# Altium PCB 脉冲延时.PcbDoc
Units mm, origin at the board's own origin, x right, y up, seen from the top; angles counter-clockwise.
Board outline 31.5 x 23 mm, 2 copper layers (Top Layer, Bottom Layer); 15 components, 13 nets, 70 pads, 23 vias.
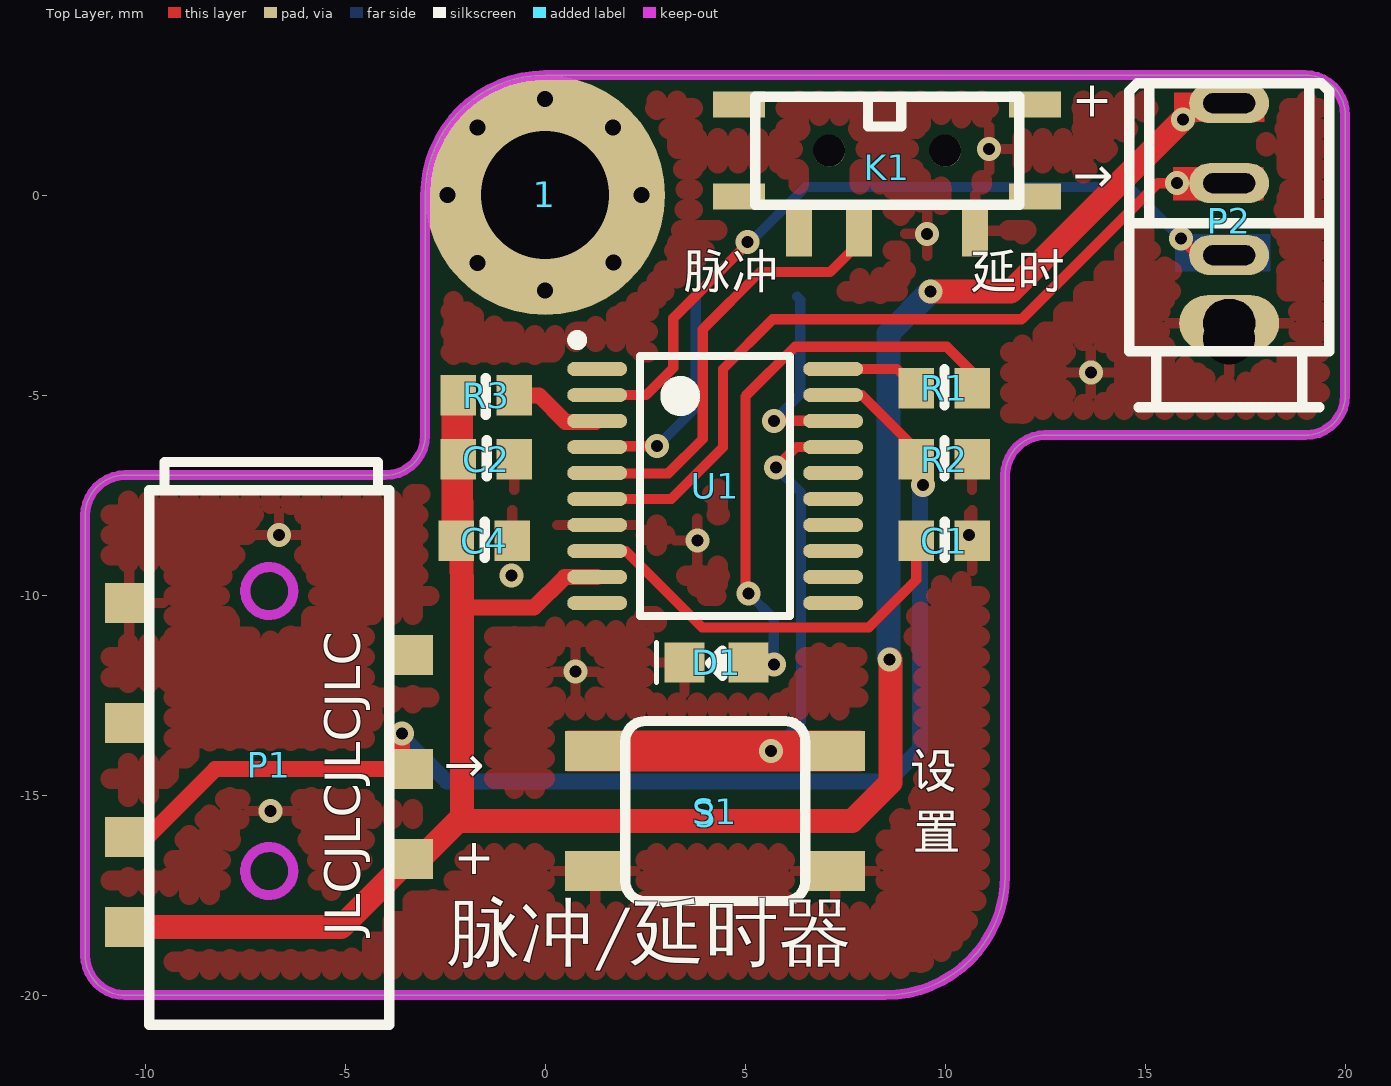
[diagram p0: Top Layer view]
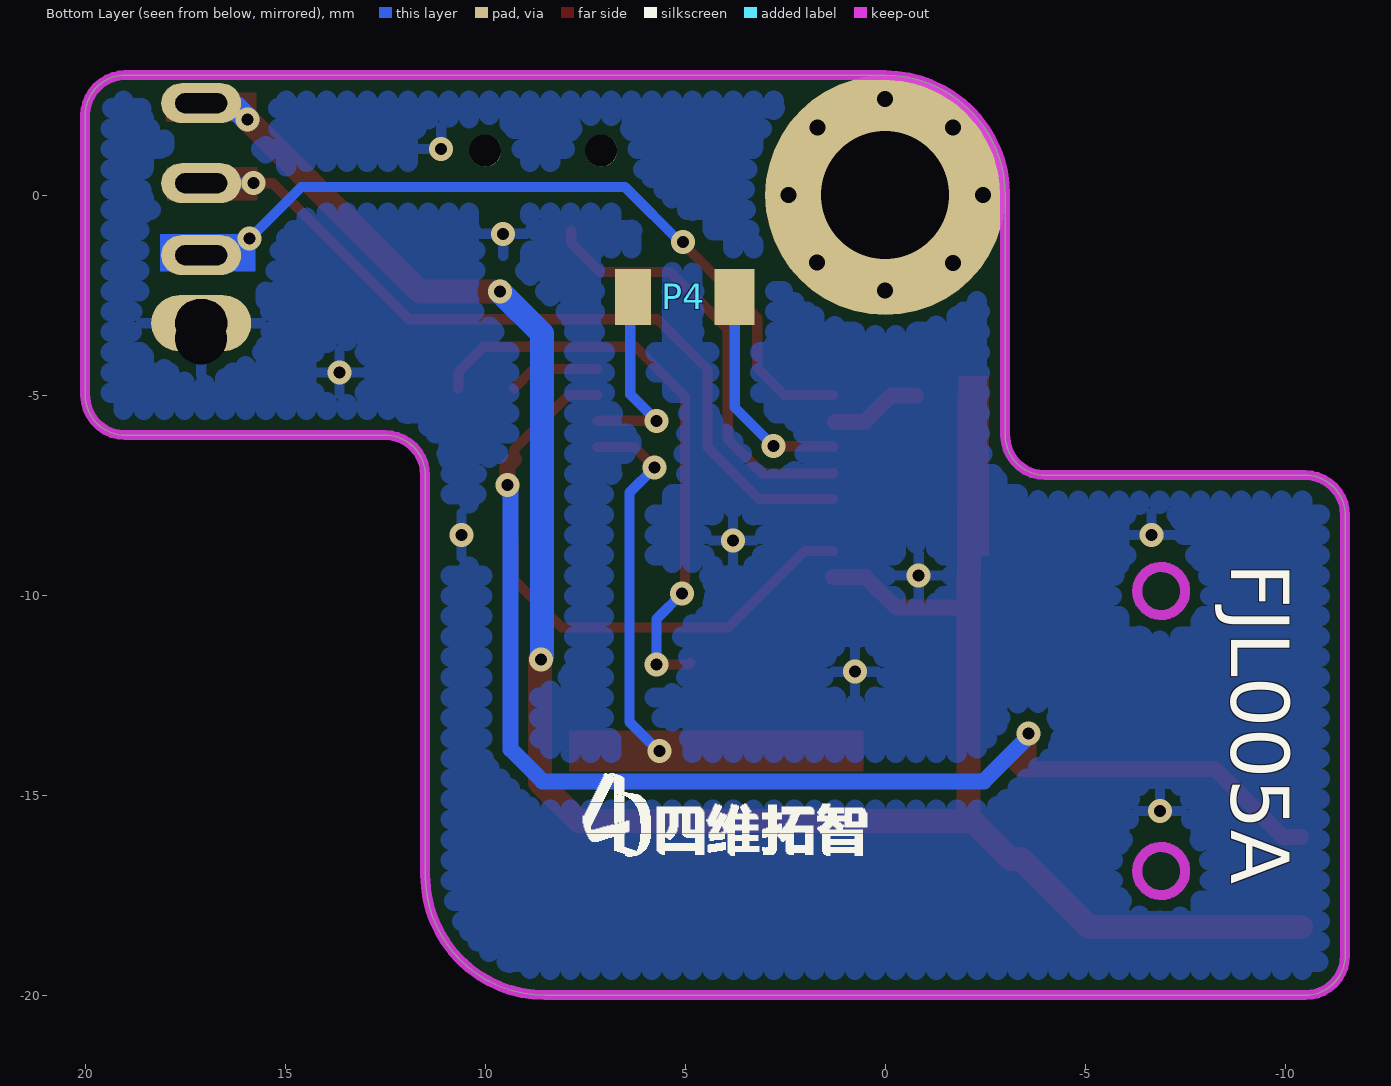
[diagram p1: Bottom Layer view, seen from below]
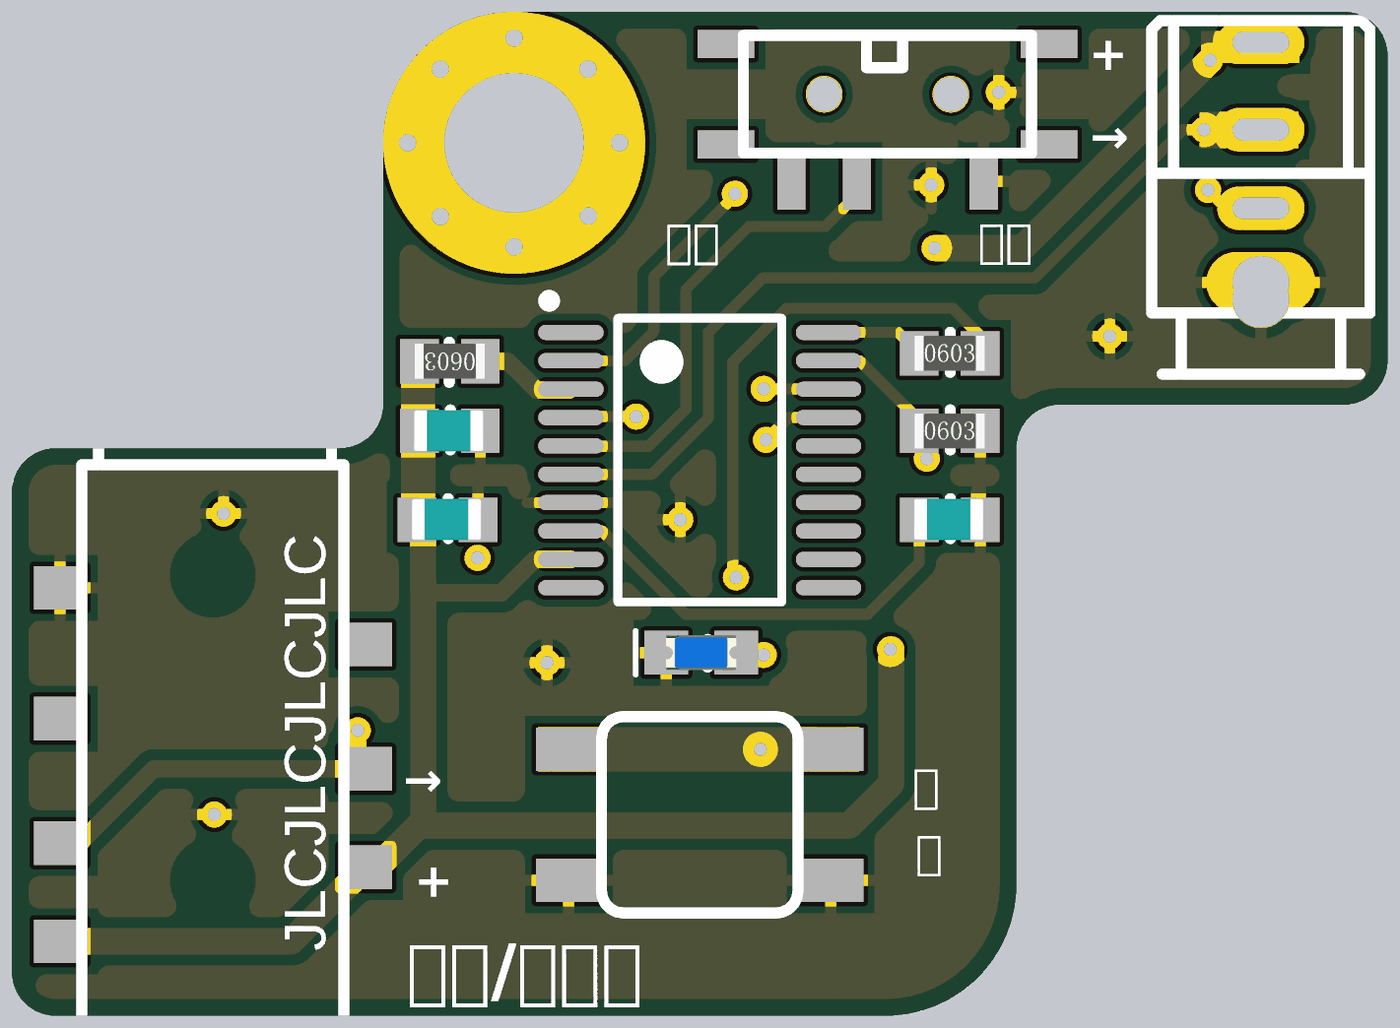
[diagram p2: 3D render of the assembled board from above, using the file's embedded part models]

## Layer stack, top to bottom
Top Layer: signal copper 0.0356
Dielectric: dielectric 0.32, FR-4, Dk 4.8
Bottom Layer: signal copper 0.0356

## Board outline
-11.5,-19 -11.5,-8 cw(c-10.5,-8) -10.5,-7 -4,-7 ccw(c-4,-6) -3,-6 -3,0 cw(c0,0) 0,3 19,3 cw(c19,2) 20,2 20,-5 cw(c19,-5) 19,-6 12.5,-6 ccw(c12.5,-7) 11.5,-7 11.5,-17 cw(c8.5,-17) 8.5,-20 -10.5,-20 cw(c-10.5,-19)

## Design rules (kind name [scope] priority, off if disabled: settings)
Clearance [All] p1: gap=0.254
PolygonConnect [All] p1: connectstyle=Relief reliefconductorwidth=0.254 reliefentries=4 polygonreliefangle="90 Angle"
RoutingVias [All] p1: holewidth=0.711 width=1.27 viastyle="Through Hole" minholewidth=0.711 minwidth=1.27 maxholewidth=0.711 maxwidth=1.27
SilkToSilkClearance [All] p1 off: silktosilkclearance=0.254
SilkscreenOverComponentPads [All] p1 off: minsilkscreentomaskgap=0.254
SolderMaskExpansion [All] p1: expansion=0.102
TestPointUsage [All] p1: valid=0 allowmultiple=FALSE
Testpoint [All] p1: side=15 testpointundercomponent=TRUE minsize=1.016 maxsize=2.54 preferedsize=1.524 minholesize=0 maxholesize=1.016 preferedholesize=0.813 testpointgrid=0.025 style=1023 order=0123456789
Width [All] p1: maxlimit=0.6 minlimit=0.254 preferedwidth=0.254
22 further rules are at their usual default settings.

## Classes and differential pairs
component class 脉冲延时: 1 C1 C2 C4 D1 K1 P1 P2 P4 R1 R2 R3 S1 U1

## Components (designator, comment, footprint, x,y, rotation, side; value= is the part's Value field where it differs from the comment)
1 "M4固定孔" M4固定孔 0,0 r90 top
3 "" "LOGO B1" 4.031,-15.475 r0 top
C1 "1uF" 0603C 9.976,-8.636 r0 top
C2 "100nF" 0603C -1.473,-6.604 r0 top
C4 "10uF" 0603C -1.524,-8.636 r0 top
D1 "LED" 0603D 4.283,-11.684 r180 top
K1 "单刀双掷开关" 侧拨7P2档MSK开关 8.55,1.112 r0 top
P1 "4段3.5插座" 4段3.5耳机贴片座 -6.9,-13.596 r180 top
P2 "4段3.5插头" 4段3.5插头 17.1,0.3 r270 top
P4 "测试点2" 2SMT-2.54 5.032,-2.54 r180 bottom
R1 "1K" 0603R 9.973,-4.826 r0 top
R2 "100K" 0603R 9.973,-6.604 r0 top
R3 "10K" 0603R -1.473,-5.004 r180 top
S1 "按键" 按键4.5*4.5*4.8 4.25,-15.398 r270 top
U1 "STM8S003" TSSOP20 4.25,-7.27 r0 top

## Footprints (in the part's own frame and the unit in brackets; to place one, negate y for a bottom-side part, rotate by r counter-clockwise, add the part's x,y. Pads: shape width x height; smd on the part's side, far side on the other; paste and mask are expansions set on the pad)
2SMT-2.54 [mm]
  rect 0.9x1.4 smd: 1(-1.27,0)
  rect 1x1.4 smd: 2(1.27,0)
4段3.5插头 [mm]
  oval 1.4x2.5 hole 1.2 slot 1.3 at 90 deg: 1(3.5,0)
  round 1 hole 1.3: 1(3.886,0)
  oval 1x2 hole 0.5 slot 1.3 at 90 deg: 2(1.8,0) 3(0,0) 4(-2,0)
  silkscreen extent -2.5,-2.5 5.6,2.5, body extent -3.33,-2.54 20.32,2.46, height 5
4段3.5耳机贴片座 [mm]
  rect 1.2x1 smd: 1(3.5,-3.4) 2(-3.5,-2.1) 2(3.5,-0.4) 3(-3.5,0.75) 3(3.5,2.45) 4(-3.5,3) 4(3.5,4.7)
  Keep-Out Layer circle w0.254: c0,-3.7 r0.6
  Keep-Out Layer circle w0.254: c0,3.3 r0.6
  silkscreen extent -3,-6.93 3,7.14, body extent -3.75,-7.38 3.86,7.12, height 5.49
0603C [mil] "Chip Capacitor, 2-Leads, Body 1.0x0.5mm, IPC Medium Density"
  rect 35x40 smd: 1(-27.5,0) 2(27.5,0)
  silkscreen extent 0,-17 0,19, body extent -32,-18 30,19, height 31
0603D [mm]
  rect 1x1 smd: 1(-0.8,0) 2(0.8,0)
  silkscreen extent -0.15,-0.5 1.5,0.5, body extent -0.81,-0.4 0.81,0.4, height 0.6
0603R [mil]
  rect 35x40 smd: 1(-27.5,0) 2(27.5,0)
  silkscreen extent 0,-17 0,19, body extent -31,-16 32,16, height 18
"LOGO B1" [mm]
M4固定孔 [mm]
  round 0.8 hole 0.4: 0(0,2.438) 1(1.689,1.689) 2(2.4,0) 3(1.689,-1.689) 4(0,-2.413) 5(-1.676,-1.702) 6(-2.388,0) 7(-1.689,1.689)
  round 6 hole 3.2: 0(0,0)
TSSOP20 [mm]
  oval 1.5x0.35 smd: 1(-2.95,2.925) 2(-2.95,2.275) 3(-2.95,1.625) 4(-2.95,0.975) 5(-2.95,0.325) 6(-2.95,-0.325) 7(-2.95,-0.975) 8(-2.95,-1.625) 9(-2.95,-2.275) 10(-2.95,-2.925) 11(2.95,-2.925) 12(2.95,-2.275) 13(2.95,-1.625) 14(2.95,-0.975) 15(2.95,-0.325) 16(2.95,0.325) 17(2.95,0.975) 18(2.95,1.625) 19(2.95,2.275) 20(2.95,2.925)
  silkscreen extent -3.57,-3.25 1.88,3.77, body extent -3.15,-3.25 3.1,3.25, height 2
侧拨7P2档MSK开关 [mm]
  rect 0.65x1.3 smd: 1(2.2,-2) 2(-0.7,-2) 3(-2.2,-2)
  rect 1.3x0.65 smd: 4(-3.7,-1.15) 5(-3.7,1.15) 6(3.7,1.15) 7(3.7,-1.15)
  round 0.8 hole 0.8: 8(-1.45,0) 9(1.45,0)
  silkscreen extent -3.3,-1.35 3.3,1.35, body extent -3.43,-1.48 3.43,1.48, height 2
按键4.5*4.5*4.8 [mm]
  rect 1x1.5 smd: 1(-1.5,3) 1(-1.5,-3) 2(1.5,3) 2(1.5,-3)
  silkscreen extent -2.25,-2.25 2.25,2.25, body extent -2.26,-3.71 2.26,3.68, height 4.8

## Part data
C1 C2 C4: library part Cap, "Capacitor"
D1: library part LED0, "Typical INFRARED GaAs LED"
P4: library part "Header 2", "Header, 2-Pin"
R1 R2 R3: library part Res1, "Resistor"
S1: library part SW-PB, "Switch"

## Via types
v1: diameter 0.6, hole 0.3, Top Layer to Bottom Layer, 23 vias

## Nets (pads, with @x,y where several pads share a name; then routed paths per layer and width w, separated by ;. In a path a pad name is that pad's centre, name@x,y a point inside that pad or via, vN(x,y) a via of type N, cw(c..) or ccw(c..) an arc to the next point about the centre after c; other vN are vias at no path point)
GND: C1.2 C2.2 C4.2 D1.2 K1.1 P1.1 P2.1 R2.2 S1.2 U1.7
  other v1: -6.866,-15.392 0.754,-11.913 -0.838,-9.511 3.802,-8.636 -6.655,-8.495 10.592,-8.495 13.64,-4.431 9.55,-0.965 11.1,1.157
IN: P1.3 R2.1 U1.19 | length 32.8
  Top Layer w0.254: U1.19@7.209,-5.004 U1.19 7.911,-4.995 9.275,-6.358 R2.1
  Top Layer w0.4: P1.3@-10.4,-16.046 -9.95,-16.046 -8.25,-14.346 P1.3@-3.4,-14.346 ; v1(-3.581,-13.462) -3.581,-14.165 P1.3@-3.4,-14.346 ; P1.3@-3.277,-14.223 P1.3@-3.4,-14.346 ; R2.1 9.449,-6.778 v1(9.449,-7.239)
  Bottom Layer w0.4: v1@-3.581,-13.538 -2.468,-14.652 8.564,-14.652 9.365,-13.851 9.365,-7.323 v1(9.449,-7.239)
NetC1_1: C1.1 U1.8 | length 10.2
  Top Layer w0.254: U1.8 2.012,-8.895 3.92,-10.803 8.095,-10.803 9.278,-9.62 C1.1
NetD1_1: D1.1 R1.2 | length 14.7
  Top Layer w0.254: D1.1@4.864,-11.684 4.915,-11.735 v1(5.715,-11.735) ; v1(5.08,-9.957) 5.004,-9.881 5.004,-5.029 6.244,-3.789 10.037,-3.789 10.672,-4.423 R1.2
  Bottom Layer w0.254: v1(5.08,-9.957) 5.715,-10.592 v1(5.715,-11.735)
NetK1_2: K1.2 U1.5 | length 10.9
  Top Layer w0.254: U1.5 1.31,-6.955 3.076,-6.955 3.937,-6.094 3.937,-3.353 5.371,-1.919 7.123,-1.919 7.85,-1.192 K1.2
NetR1_1: R1.1 U1.20 | length 2.3
  Top Layer w0.254: U1.20 8.794,-4.345 R1.1
NetR3_1: R3.1 U1.3 | length 2.3
  Top Layer w0.4: R3.1 -0.156,-5.004 0.506,-5.666 U1.3@1.258,-5.666
NetS1_1: S1.1 U1.17 | length 15.3
  Top Layer w0.254: v1(5.766,-6.807) 6.278,-6.295 U1.17
  Top Layer w0.6: S1.1@1.25,-13.898 v1(5.639,-13.898) S1.1@7.25,-13.898
  Bottom Layer w0.254: v1(5.639,-13.898) 5.66,-13.898 6.396,-13.162 6.396,-7.437 v1(5.766,-6.807)
NRST: P4.2 U1.4 | length 5.6
  Top Layer w0.254: U1.4 1.321,-6.274 v1(2.794,-6.274)
  Bottom Layer w0.254: v1(2.794,-6.274) 3.762,-5.306 P4.2
OUT: P2.3 U1.6 | length 20.2
  Top Layer w0.254: U1.6 3.154,-7.595 4.445,-6.304 4.445,-4.343 5.69,-3.099 11.911,-3.099 15.31,0.3 v1(15.799,0.3)
  Bottom Layer w0.254: v1(15.799,0.3) P2.3
SWIM: P4.1 U1.18 | length 4.9
  Top Layer w0.254: v1(5.715,-5.639) 7.194,-5.639 U1.18
  Bottom Layer w0.254: v1(5.715,-5.639) 6.375,-4.978 6.375,-2.613 P4.1
TX: P2.2 U1.2 | length 20.1
  Top Layer w0.254: U1.2 2.523,-4.995 3.2,-4.318 3.2,-3.073 v1@4.928,-1.346 ; v1(15.889,-1.081) 16.308,-1.5 P2.2
  Bottom Layer w0.254: v1(5.055,-1.168) 5.105,-1.118 v1@5.105,-1.067 ; v1@5.093,-1.206 6.502,0.203 14.605,0.203 v1(15.889,-1.081) ; P2.2@16.308,-1.5 P2.2
VCC: C2.1 C4.1 P1.4 P2.4 R3.2 U1.9 | length 57
  Top Layer w0.4: -2.083,-10.312 -0.282,-10.312 0.485,-9.545 U1.9
  Top Layer w0.6: P1.4@-10.4,-18.296 -5.1,-18.296 -3.4,-16.596 -3.134,-16.596 -2.184,-15.646 -2.083,-15.646 ; R3.2 -2.108,-5.067 -2.108,-6.604 -2.094,-8.635 -2.083,-10.312 -2.083,-15.646 ; v1@8.636,-11.608 8.636,-14.681 7.671,-15.646 -2.083,-15.646 ; v1(9.627,-2.413) 11.633,-2.413 v1(15.939,1.892)
  Bottom Layer w0.6: v1@8.585,-11.532 8.585,-3.454 v1(9.627,-2.413) ; v1(15.939,1.892) 16.231,2.184 16.984,2.184 P2.4
  other v1: 8.611,-11.608
pads on no net: 1.0 1.1 1.2 1.3 1.4 1.5 1.6 1.7 K1.3 K1.4 K1.5 K1.6 K1.7 K1.8 K1.9 P1.2 U1.1 U1.10 U1.11 U1.12 U1.13 U1.14 U1.15 U1.16

## Polygon pours and split planes (outlines as drawn)
GND on Top Layer "Bottom Layer-No Net" (hatched 90Degree grid 0.508 track 0.508, remove dead copper, pour order 1000): -14.656,5.74 22.098,5.74 22.606,6.248 22.784,6.071 22.784,-24.74 -15.977,-24.74 -16.078,-24.638 -14.656,-23.216 -14.656,5.74
GND on Bottom Layer "Bottom Layer-No Net" (hatched 90Degree grid 0.508 track 0.508, remove dead copper, pour order 1001): -12.7,5.029 -12.624,5.105 21.133,5.105 21.133,-22.174 20.904,-22.403 20.599,-22.098 -14.249,-22.098 -14.249,3.124 -12.04,5.334

## Keep-outs
Keep-Out Layer:
  the board outline again, w0.25

## Other copper
Top Layer:
  rectangle net OUT: 15.697,-0.127 17.958,0.711
  rectangle net VCC: 15.723,1.829 17.983,2.565
  rectangle net VCC: -2.591,-9.017 -1.829,-4.521
  rectangle net NetS1_1: 0.542,-14.407 7.908,-13.386
Bottom Layer:
  rectangle net TX: 15.748,-1.905 18.136,-0.965

## Silkscreen, mask and mechanical layers (free items; w line width, h text height)
Top Overlay:
  text "+" at 13.157,1.665 h1.52
  text "→" at 13.183,-0.229 h1.52
  text "延时" at 10.617,-2.611 h1.5
  text "脉冲" at 3.454,-2.616 h1.5
  text "→" at -2.54,-14.961 h1.52
  text "设" at 9.118,-15.099 h1.5
  text "置" at 9.187,-16.623 h1.5
  text "+" at -2.292,-17.272 h1.52
  text "JLCJLCJLCJLC" at -4.326,-18.517 h1.52 r90
  text "脉冲/延时器" at -2.464,-19.519 h2.3
Bottom Overlay:
  text "FJL005A" at -8.161,-9.194 h2.5 r90